# Altium PCB K10P100最小系统V1.0.PcbDoc (part 1 of 2)
Units mil, origin at the board's own origin, x right, y up, seen from the top; angles counter-clockwise.
Board outline 4763.81 x 2088.61 mil, 2 copper layers (Top Layer, Bottom Layer); 125 components, 121 nets, 468 pads, 200 vias.
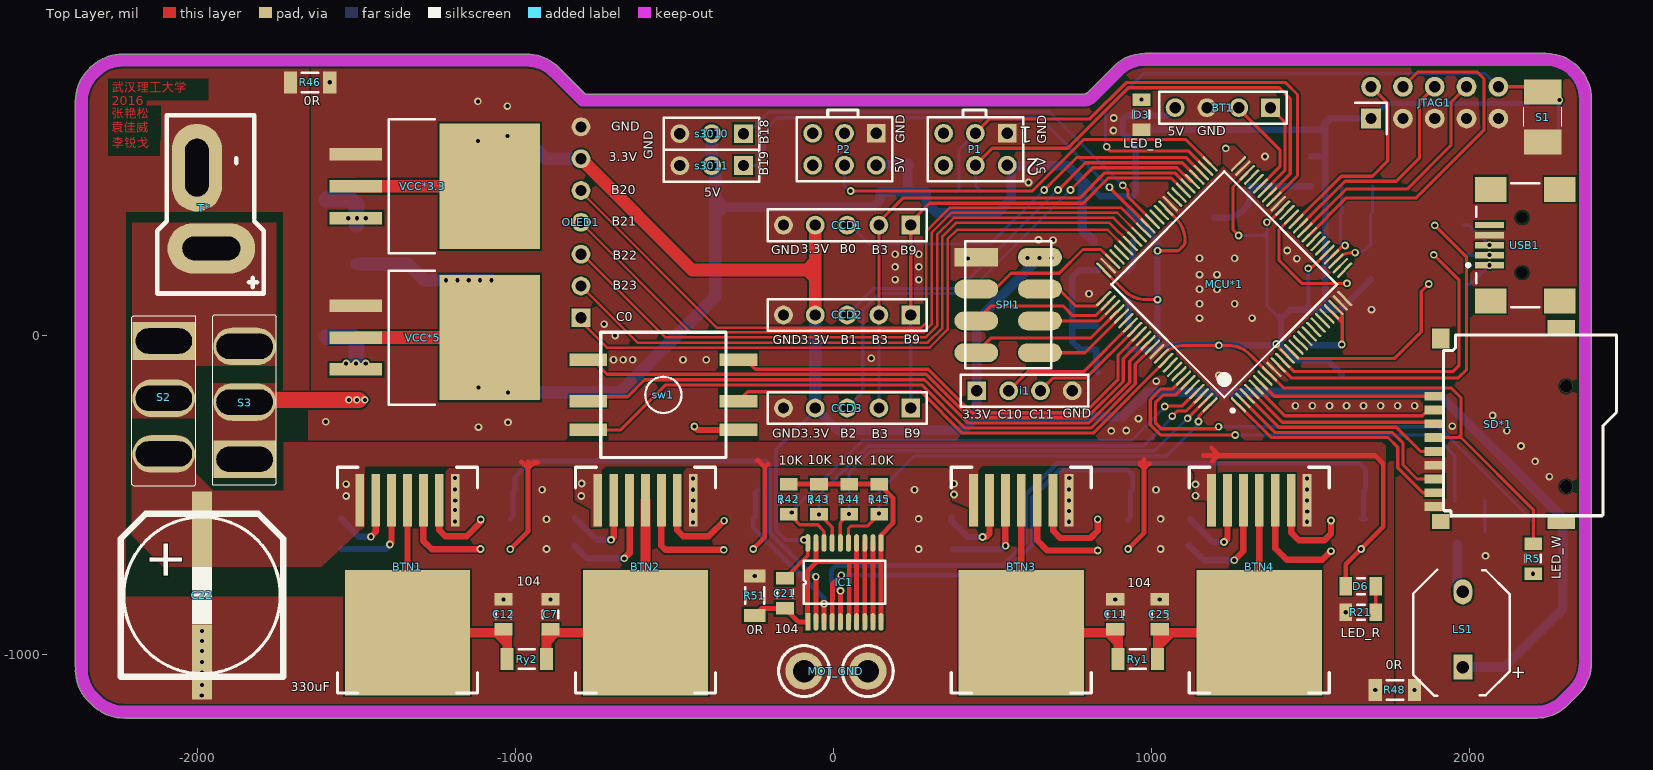
[diagram p0: Top Layer view]
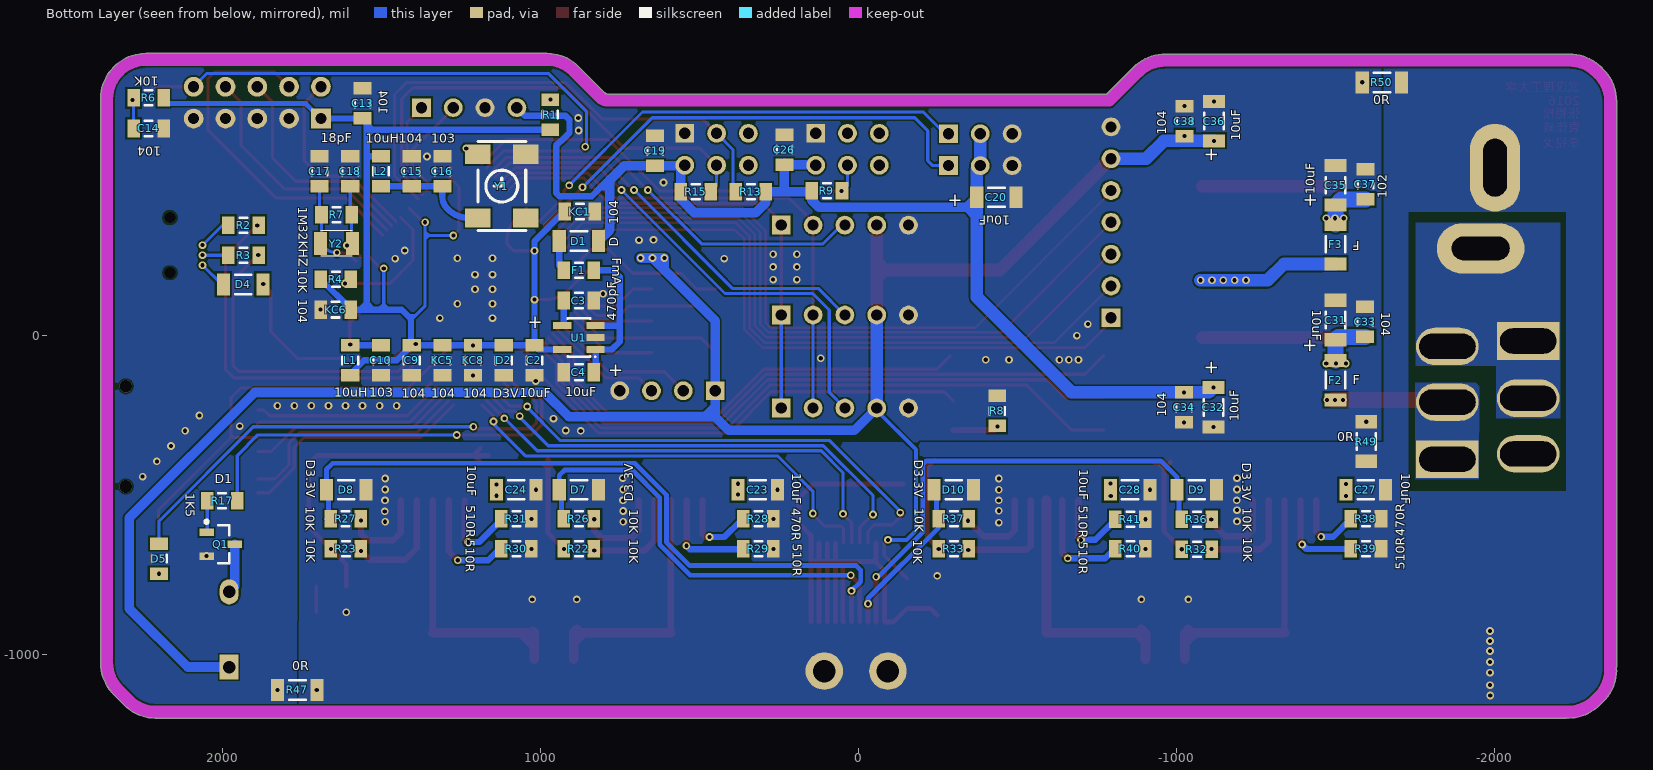
[diagram p1: Bottom Layer view, seen from below]

## Layer stack, top to bottom
Top Layer: signal copper 1.4
Dielectric: dielectric 12.6, FR-4, Dk 4.8
Bottom Layer: signal copper 1.4

## Board outline
-2381.9,-1050.2 ccw(c-2243.39,-1050.2) -2341.34,-1148.14 -2329.8,-1159.68 cw(c-2315.87,-1145.75) -2329.81,-1159.67 -2329.8,-1159.68 ccw(c-2230.51,-1060.39) -2230.51,-1200.8 ccw(c-2230.51,-1181.1) -2225.98,-1200.28 ccw(c-2221.46,-1181.1) -2221.46,-1200.8 2211.53,-1200.8 ccw(c2211.53,-1066.85) 2306.25,-1161.57 2340.78,-1127.04 ccw(c2241.49,-1027.76) 2381.9,-1027.76 ccw(c2362.2,-1027.76) 2380.8,-1021.26 ccw(c2362.2,-1014.76) 2381.9,-1014.76 2381.9,742.13 ccw(c2362.2,742.13) 2381.8,744.19 ccw(c2362.2,746.26) 2381.9,746.26 ccw(c2241.49,746.26) 2340.78,845.55 ccw(c2326.85,831.62) 2340.77,845.56 2340.78,845.55 2339.64,846.68 ccw(c2240.35,747.4) 2240.35,887.81 979.13,887.81 ccw(c979.13,747.4) 879.85,846.68 ccw(c893.78,832.75) 879.84,846.67 879.85,846.68 796.99,763.83 cw(c810.92,749.9) 797,763.84 796.99,763.83 ccw(c810.92,749.9) 796.97,763.8 ccw(c787.4,773.42) 796.99,763.83 796.97,763.8 cw(c787.4,773.42) 787.4,759.86 -779.24,759.86 -864.1,844.72 ccw(c-963.39,745.43) -963.39,885.84 -2234.45,885.84 ccw(c-2234.45,745.43) -2333.73,844.72 ccw(c-2319.8,830.79) -2333.74,844.71 -2333.73,844.72 -2340.78,837.67 cw(c-2326.85,823.74) -2340.77,837.68 -2340.78,837.67 ccw(c-2241.49,738.39) -2381.9,738.39 -2381.9,-1040.35 ccw(c-2362.2,-1040.35) -2381.28,-1045.28 ccw(c-2362.2,-1050.2)

## Design rules (kind name [scope] priority, off if disabled: settings)
Clearance Clearance_1 [All] p1: gap=6
Clearance [InNet('EGND')] p2: gap=15
PolygonConnect [All] p1: connectstyle=Direct reliefconductorwidth=10 reliefentries=4 polygonreliefangle="90 Angle" airgapwidth=10
RoutingVias [All] p1: holewidth=28 width=50 viastyle="Through Hole" minholewidth=28 minwidth=50 maxholewidth=28 maxwidth=50
SolderMaskExpansion [All] p1: expansion=4
Width [All] p1: maxlimit=50 minlimit=6 preferedwidth=20 minimp=50.000000 maximp=50.000000 favimp=50.000000
28 further rules are at their usual default settings.

## Classes and differential pairs
component class 电源: C31 C32 C33 C34 C35 C36 C37 C38 F2 F3 R46 R47 R48 R49 R50 S3 T* VCC*2 VCC*3.3 VCC*5
component class 电机驱动: BTN1 BTN2 BTN3 BTN4 C7 C11 C12 C22 C23 C24 C25 C27 C28 D6 D7 D8 D9 D10 IC5 MOT_GND R21 R22 R23 R26 R27 R28 R29 R30 R31 R32 R33 R36 R37 R38 R39 R40 R41 Ry1 Ry2 S2
component class 其他外设: BT1 C19 C20 C21 C26 CCD1 CCD2 CCD3 i1 IC1 LS1 OLED1 P1 P2 Q1 R8 R9 R13 R15 R17 R42 R43 R44 R45 R51 s3010 s3011 SD*1 SPI1 sw1 U3
component class K10P100最小系统V1.0: C2 C3 C4 C9 C10 C13 C14 C15 C16 C17 C18 D1 D2 D3 D4 D5 F1 JTAG1 KC1 KC5 KC6 KC8 L1 L2 MCU*1 R1 R2 R3 R4 R5 R6 R7 S1 U1 USB1 Y1 Y2

## Components (designator, comment, footprint, x,y, rotation, side; value= is the part's Value field where it differs from the comment)
BT1 "Header 4" HDR1X4 1374.02,717.52 r180 top
BTN1 "BTN7960" PG-TO263-7-1 -1338.58,-472.44 r180 top
BTN2 "BTN7960" PG-TO263-7-1 -590.55,-472.44 r180 top
BTN3 "BTN7960" PG-TO263-7-1 590.55,-472.44 r180 top
BTN4 "BTN7960" PG-TO263-7-1 1338.58,-472.44 r180 top
C2 "Cap Pol1" C2012 1018.7,-76.77 r270 bottom
C3 "470pF" C2012 878.94,111.22 r0 bottom
C4 "10UF" C2012 878.94,-114.17 r180 bottom
C7 "Cap" C2012 -888.78,-875 r90 top
C9 "100nF" C2012 1404.53,-76.77 r90 bottom
C10 "10nF" C2012 1500.98,-76.77 r90 bottom
C11 "Cap" C2012 885.83,-875 r90 top
C12 "Cap" C2012 -1036.42,-875 r90 top
C13 "100nF" C2012 1559.06,731.3 r90 bottom
C14 "100nF" C2012 2231.3,652.56 r0 bottom
C15 "10nF" C2012 1404.53,517.72 r270 bottom
C16 "100nF" C2012 1308.07,517.72 r270 bottom
C17 "18pF" C2012 1693.9,517.72 r270 bottom
C18 "18pF" C2012 1597.44,517.72 r270 bottom
C19 "100nF" C2012 639.76,581.69 r270 bottom
C20 "Cap Pol1" 1206(2) -433.07,436.02 r180 bottom
C21 "100nF" C2012 -152.56,-809.06 r270 top
C22 "Cap Pol1" SMD-EC-F12.5 -1984.25,-606.3 r270 top
C23 "Cap Pol1" 1206(2) 316.93,-483.27 r180 bottom
C24 "Cap Pol1" 1206(2) 1075.79,-483.27 r180 bottom
C25 "Cap" C2012 1025.59,-875 r270 top
C26 "100nF" C2012 233.27,585.63 r270 bottom
C27 "Cap Pol1" 1206(2) -1593.5,-483.27 r180 bottom
C28 "Cap Pol1" 1206(2) -853.35,-483.27 r180 bottom
C31 "Cap Pol1" 1206(2) -1499.02,50.2 r90 bottom
C32 "Cap Pol1" 1206(2) -1115.16,-224.41 r270 bottom
C33 "Cap" C2012 -1591.54,44.29 r270 bottom
C34 "Cap" C2012 -1022.64,-224.41 r90 bottom
C35 "Cap Pol1" 1206(2) -1499.02,473.43 r90 bottom
C36 "Cap Pol1" 1206(2) -1117.13,675.2 r90 bottom
C37 "Cap" C2012 -1592.52,476.38 r270 bottom
C38 "Cap" C2012 -1024.61,675.2 r270 bottom
CCD1 "CCD" HDR1X5 243.11,348.43 r180 top
CCD2 "CCD" HDR1X5 243.11,65.94 r180 top
CCD3 "CCD" HDR1X5 243.11,-226.38 r180 top
D1 "Diode" 1206(2) 878.94,298.23 r0 bottom
D2 "1N4729A" C2012 1115.16,-76.77 r90 bottom
D3 "POWER" C2012 968.5,695.87 r270 top
D4 "Diode" 1206(2) 1934.06,162.4 r180 bottom
D5 "POWER" C2012 2198.82,-699.8 r90 bottom
D6 "LED" C2012 1657.48,-786.42 r0 top
D7 "1SS355" 1206(2) 878.94,-483.27 r0 bottom
D8 "1SS355" 1206(2) 1610.24,-483.27 r0 bottom
D9 "1SS355" 1206(2) -1062.99,-483.27 r0 bottom
D10 "1SS355" 1206(2) -299.21,-483.27 r0 bottom
F1 "300mA" R2012 878.94,206.69 r0 bottom
F2 "1.5A" 1206(2) -1499.02,-138.78 r90 bottom
F3 "500mA" 1206(2) -1499.02,288.39 r90 bottom
i1 "Header 4" HDR1X4 450.79,-172.24 r0 top
IC1 "74LVC245" "TSSOP20 74lvc245" 34.45,-773.62 r90 top
JTAG1 "Header 5X2" IDC5X2 1889.76,733.27 r0 top
KC1 "100nF" C2012 875.98,390.75 r0 bottom
KC5 "100nF" C2012 1308.07,-76.77 r90 bottom
KC6 "100nF" C2012 1643.7,82.68 r180 bottom
KC8 "100nF" C2012 1211.61,-76.77 r90 bottom
L1 "Inductor" C2012 1597.44,-76.77 r90 bottom
L2 "Inductor" C2012 1500.98,517.72 r270 bottom
LS1 "Buzzer" ABSM-1574 1968.5,-1154.53 r90 top
MCU*1 "k60P100" LQFP100 1228.35,162.4 r135 top
MOT_GND "Motor" KF301-2P 7.87,-1053.15 r180 top
OLED1 "Header 7" HDR1X7 -793.31,57.09 r90 top
P1 "Header 3X2" HDR2X3 546.26,636.81 r180 top
P2 "Header 3X2" HDR2X3 134.84,636.81 r180 top
Q1 "QNPN" SOT95P240-3N 2004.92,-654.53 r180 bottom
R1 "1K" R2012 968.5,695.87 r270 bottom
R2 "33R" R2012 1933.07,348.43 r180 bottom
R3 "33R" R2012 1933.07,253.94 r180 bottom
R4 "10K" R2012 1642.72,178.15 r180 bottom
R5 "1K" R2012 2198.82,-699.8 r90 top
R6 "10K" R2012 2231.3,748.03 r180 bottom
R7 "1M" R2012 1640.75,380.91 r180 bottom
R8 "0R" R2012 -435.04,-235.24 r270 bottom
R9 "Res2" R2012 99.41,456.69 r0 bottom
R13 "Res2" R2012 338.58,453.74 r180 bottom
R15 "Res2" R2012 511.81,453.74 r180 bottom
R17 "Res2" R2012 2000,-517.72 r180 bottom
R21 "Res2" R2012 1657.48,-868.11 r0 top
R22 "Res2" R2012 878.94,-669.29 r0 bottom
R23 "Res2" R2012 1611.22,-669.29 r180 bottom
R26 "Res2" R2012 878.94,-574.8 r180 bottom
R27 "Res2" R2012 1612.2,-574.8 r0 bottom
R28 "Res2" R2012 314.96,-574.8 r0 bottom
R29 "Res2" R2012 314.96,-669.29 r0 bottom
R30 "Res2" R2012 1075.79,-669.29 r0 bottom
R31 "Res2" R2012 1075.79,-574.8 r0 bottom
R32 "Res2" R2012 -1062.99,-670.28 r0 bottom
R33 "Res2" R2012 -299.21,-669.29 r180 bottom
R36 "Res2" R2012 -1062.99,-575.79 r180 bottom
R37 "Res2" R2012 -299.21,-574.8 r0 bottom
R38 "Res2" R2012 -1594.49,-574.8 r0 bottom
R39 "Res2" R2012 -1594.49,-669.29 r0 bottom
R40 "Res2" R2012 -854.33,-669.29 r0 bottom
R41 "Res2" R2012 -854.33,-575.79 r0 bottom
R42 "Res2" R2012 -139.76,-512.8 r90 top
R43 "Res2" R2012 -45.28,-512.8 r90 top
R44 "Res2" R2012 49.21,-512.8 r90 top
R45 "Res2" R2012 143.7,-512.8 r90 top
R46 "Res2" 1206(2) -1644.68,797.24 r180 top
R47 "Res2" 1206(2) 1763.78,-1112.2 r180 bottom
R48 "Res2" 1206(2) 1764.76,-1112.2 r180 top
R49 "Res2" 1206(2) -1595.47,-331.69 r270 bottom
R50 "Res2" 1206(2) -1644.68,797.24 r180 bottom
R51 "Res2" 1206(2) -247.05,-815.94 r270 top
Ry1 "" 1206(2) 956.69,-1015.75 r0 top
Ry2 "" 1206(2) -963.58,-1015.75 r0 top
S1 "SW-PB" "sw 3*4 *2" 2289.37,609.25 r90 top
S2 "SW-SPST" SW-125V6A(-) -2104.33,-15.75 r270 top
S3 "SW-SPST" SW-125V6A(-) -1850.39,-387.8 r90 top
s3010 "Header 3" HDR1X3 -282.48,635.83 r180 top
s3011 "Header 3" HDR1X3 -282.48,535.43 r180 top
SD*1 "TF_card" SD_card 2233.27,-353.35 r180 top
SPI1 "Header 4X2A" "SMT head4*1" 554.13,92.52 r0 top
sw1 "SW-5" SW-5 -534.45,-185.04 r0 top
T* "T头" T插 -1971.46,478.35 r270 top
U1 "MIC5219" SOT-23-5 878.94,-4.92 r90 bottom
USB1 "USB-MINI-B" USB-MINI-B 2371.06,285.43 r0 top
VCC*3.3 "LM1086" "DPAK LM2940" -1252.95,470.47 r0 top
VCC*5 "LM1084" "DPAK LM2940" -1252.95,-4.92 r0 top
Y1 "50MHZ" 贴片有源晶体 1046.26,371.06 r90 bottom
Y2 "32.768K" CT3215 1690.94,290.35 r180 bottom

## Footprints (in the part's own frame and the unit in brackets; to place one, negate y for a bottom-side part, rotate by r counter-clockwise, add the part's x,y. Pads: shape width x height; smd on the part's side, far side on the other; paste and mask are expansions set on the pad)
1206(2) [mm]
  rect 1.05x1.75 smd: 1(-1.575,0) 2(1.575,0)
  silkscreen extent -0.65,-0.77 0.65,0.77, body extent -1.6,-0.8 1.6,0.8, height 1.6
ABSM-1574 [mm] "Magnetic Transducer Buzzer"
  rect 2x1.5 hole 1: 1A(2.9,-0.25)
  oval 2x1.5 hole 1: 2A(8.9,-0.25)
  silkscreen extent 0.6,-4 10.68,3.72
C2012 [mm] "Chip Capacitor, 2-Leads, Body 2.0x1.2mm, IPC Low Density"
  rect 1x1.45 smd: 1(-1.2,0) 2(1.2,0)
  silkscreen extent -0.3,-0.63 0.3,0.63, body extent -0.98,-0.6 1.02,0.6, height 0.5
CT3215 [mm]
  rect 1.05x1.85 smd: 1(0,0) 2(2.54,0)
  silkscreen extent 0,-1.02 2.54,1.02
"DPAK LM2940" [mm] "D2-PAK, 4-Pads, Body 7.93x8.69mm (max), IPC Medium Density"
  rect 4.2x1 smd: 1(-6.3,2.54) 2(-6.3,0) 3(-6.3,-2.54)
  rect 8x10 smd: 4(4.4,0)
  silkscreen extent -3.65,-5.35 0,5.35, body extent -3.65,-5.33 6,5.33, height 4.83
HDR1X3 [mm] "Connector; Header; 3 Position"
  rect 1.5x1.5 hole 0.9: 1(0,0)
  round 1.5 hole 0.9: 2(2.54,0) 3(5.08,0)
  silkscreen extent -1.27,-1.27 6.35,1.27, body extent -1.27,-1.27 6.35,1.27, height 7.58
HDR1X4 [mm] "Connector; Header; 4 Position"
  rect 1.5x1.5 hole 0.9: 1(0,0)
  round 1.5 hole 0.9: 2(2.54,0) 3(5.08,0) 4(7.62,0)
  silkscreen extent -1.27,-1.27 8.89,1.27, body extent -1.27,-1.27 8.89,1.27, height 7.58
HDR1X5 [mm] "Connector; Header; 5 Position"
  rect 1.5x1.5 hole 0.9: 1(0,0)
  round 1.5 hole 0.9: 2(2.54,0) 3(5.08,0) 4(7.62,0) 5(10.16,0)
  silkscreen extent -1.27,-1.27 11.43,1.27
HDR1X7 [mm] "Connector; Header; 7 Position"
  rect 1.5x1.5 hole 0.9: 1(0,0)
  round 1.5 hole 0.9: 2(2.54,0) 3(5.08,0) 4(7.62,0) 5(10.16,0) 6(12.7,0) 7(15.24,0)
HDR2X3 [mm] "Connector; Header; 3x2 Position"
  rect 1.5x1.5 hole 0.9: 1(0,0)
  round 1.5 hole 0.9: 2(0,2.54) 3(2.54,0) 4(2.54,2.54) 5(5.08,0) 6(5.08,2.54)
  silkscreen extent -1.27,-1.27 6.35,3.81, body extent -1.27,-1.27 6.35,3.81, height 7.58
IDC5X2 [mil]
  rect 62x62 hole 35: 1(-200,-50)
  round 62 hole 35: 2(-200,50) 3(-100,-50) 4(-100,50) 5(0,-50) 6(0,50) 7(100,-50) 8(100,50) 9(200,-50) 10(200,50)
  silkscreen extent -250,-100 -150,0
KF301-2P [mm]
  round 3 hole 1.8: 1(-2.54,0) 2(2.54,0)
  silkscreen extent -4.57,-2.03 4.57,2.03
LQFP100 [mm] "SQFP, 100-Leads, Body 14.00x14.00mm, Pitch 0.50mm, IPC Medium Density"
  oval 1.65x0.2 smd: 1(-7.6,6) 2(-7.6,5.5) 3(-7.6,5) 4(-7.6,4.5) 5(-7.6,4) 6(-7.6,3.5) 7(-7.6,3) 8(-7.6,2.5) 9(-7.6,2) 10(-7.6,1.5) 11(-7.6,1) 12(-7.6,0.5) 13(-7.6,0) 14(-7.6,-0.5) 15(-7.6,-1) 16(-7.6,-1.5) 17(-7.6,-2) 18(-7.6,-2.5) 19(-7.6,-3) 20(-7.6,-3.5) 21(-7.6,-4) 22(-7.6,-4.5) 23(-7.6,-5) 24(-7.6,-5.5) 25(-7.6,-6) 51(7.6,-6) 52(7.6,-5.5) 53(7.6,-5) 54(7.6,-4.5) 55(7.6,-4) 56(7.6,-3.5) 57(7.6,-3) 58(7.6,-2.5) 59(7.6,-2) 60(7.6,-1.5) 61(7.6,-1) 62(7.6,-0.5) 63(7.6,0) 64(7.6,0.5) 65(7.6,1) 66(7.6,1.5) 67(7.6,2) 68(7.6,2.5) 69(7.6,3) 70(7.6,3.5) 71(7.6,4) 72(7.6,4.5) 73(7.6,5) 74(7.6,5.5) 75(7.6,6)
  oval 0.2x1.65 smd: 26(-6,-7.6) 27(-5.5,-7.6) 28(-5,-7.6) 29(-4.5,-7.6) 30(-4,-7.6) 31(-3.5,-7.6) 32(-3,-7.6) 33(-2.5,-7.6) 34(-2,-7.6) 35(-1.5,-7.6) 36(-1,-7.6) 37(-0.5,-7.6) 38(0,-7.6) 39(0.5,-7.6) 40(1,-7.6) 41(1.5,-7.6) 42(2,-7.6) 43(2.5,-7.6) 44(3,-7.6) 45(3.5,-7.6) 46(4,-7.6) 47(4.5,-7.6) 48(5,-7.6) 49(5.5,-7.6) 50(6,-7.6) 76(6,7.6) 77(5.5,7.6) 78(5,7.6) 79(4.5,7.6) 80(4,7.6) 81(3.5,7.6) 82(3,7.6) 83(2.5,7.6) 84(2,7.6) 85(1.5,7.6) 86(1,7.6) 87(0.5,7.6) 88(0,7.6) 89(-0.5,7.6) 90(-1,7.6) 91(-1.5,7.6) 92(-2,7.6) 93(-2.5,7.6) 94(-3,7.6) 95(-3.5,7.6) 96(-4,7.6) 97(-4.5,7.6) 98(-5,7.6) 99(-5.5,7.6) 100(-6,7.6)
  silkscreen extent -7.72,-6.38 6.38,6.77, body extent -7,-7 7,7, height 1.7
PG-TO263-7-1 [mm]
  rect 0.7x4.2 smd: 1(-3.81,1.123) 2(-2.54,1.123) 3(-1.27,1.123) 4(0,1.123) 5(1.27,1.123) 6(2.54,1.123) 7(3.81,1.123)
  rect 10x10 smd: 8(0,11.684)
  silkscreen extent -5.59,-1.52 5.59,16.51
R2012 [mm] "Chip Resistor, 2-Leads, Body 2.0x1.2mm, IPC Low Density"
  rect 1x1.4 smd: 1(-1.2,0) 2(1.2,0)
  silkscreen extent -0.3,-0.6 0.3,0.6, body extent -0.98,-0.6 1.02,0.6, height 0.5
SD_card [mm]
  rect 1.6x0.7 smd: 1(8.732,-4.16) 2(8.732,-3.06) 3(8.732,-1.96) 4(8.732,-0.86) 5(8.732,0.24) 6(8.732,1.34) 7(8.732,2.44) 8(8.732,3.54) 9(8.732,4.64)
  rect 1.4x1.2 smd: 10(8.232,5.84)
  rect 2.2x1.2 smd: 11(-1.368,5.84) 12(-1.368,-9.66)
  rect 1.4x1.6 smd: 13(8.232,-8.76)
  silkscreen extent -5.79,-9.04 8.03,5.43
SMD-EC-F12.5 [mm]
  rect 6x1.6 smd: 1(0,0) 2(10.625,0)
  silkscreen extent -1.2,-6.5 11.8,6.49
"SMT head4*1" [mil]
  rect 137.8x59.06 smd: 1(-105,155)
  oval 137.8x59.06 smd: 2(-105,55) 3(-105,-45) 4(-105,-145) 5(95,155) 6(95,55) 7(95,-45) 8(95,-145)
  silkscreen extent -140,-194 130,206
SOT95P240-3N [mm] "SOT23, 3-Leads, Body 2.9x1.3mm, Pitch 0.95mm, Lead Span 2.4mm, IPC Medium Density"
  rect 1.15x0.6 smd: 1(-1.125,0.95) 2(-1.125,-0.95) 3(1.125,0)
  silkscreen extent -1.25,-1.5 0.7,1.92, body extent -0.7,-1.5 0.7,1.5, height 1.14
SOT-23-5 [mm] "SOT-23/SC-74A; 5 Leads; Body 3.1 x 3 mm, inc. leads (LxW max)"
  rect 0.55x1.45 smd: 1(-0.95,-1.329) 2(0,-1.329) 3(0.95,-1.329) 4(0.95,1.329) 5(-0.95,1.329)
  silkscreen extent -1.57,-1.35 1.55,0.9
"sw 3*4 *2" [mm]
  rect 2x3 smd: 1(0,1.524) 2(4,1.524)
  silkscreen extent 1.27,0 2.79,3.05
SW-5 [mm]
  rect 3x1 smd: 1(-6,2.8) 2(-6,-0.5) 3(-6,-2.8) 4(6,-2.8) 5(6,-0.5) 6(6,2.8)
  silkscreen extent -5,-5 5,5
SW-125V6A(-) [mm]
  rect 3x5 hole 2 slot 4.5 at 90 deg: 0(0,0)
  oval 3x5 hole 2 slot 4.5 at 90 deg: 1(4.572,0) 2(9.017,0)
  silkscreen extent -2.03,-2.54 11.56,2.54
"TSSOP20 74lvc245" [mm]
  rect 1.4x0.4 smd: 1(-3.175,2.921)
  oval 1.4x0.4 smd: 2(-3.175,2.271) 3(-3.175,1.621) 4(-3.175,0.971) 5(-3.175,0.321) 6(-3.175,-0.329) 7(-3.175,-0.979) 8(-3.175,-1.629) 9(-3.175,-2.279) 10(-3.175,-2.929) 11(3.125,-2.929) 12(3.125,-2.279) 13(3.125,-1.629) 14(3.125,-0.979) 15(3.125,-0.329) 16(3.125,0.321) 17(3.125,0.971) 18(3.125,1.621) 19(3.125,2.271) 20(3.125,2.921)
  silkscreen extent -1.74,-3.25 1.69,3.25
T插 [mm]
  oval 4x7 hole 1.9 slot 4.6 at 90 deg: 1(5.161,0.416)
  oval 7x4 hole 1.9 slot 4.6 at 0 deg: 2(-1.283,-0.727)
  silkscreen extent -5.46,-3.9 8.75,4.61
USB-MINI-B [mm] "Connector; USB2.0, Type A, SM; 5 Position; Right Angle"
  rect 2.3x0.5 smd: 1(-7.85,-1.6) 2(-7.85,-0.8) 3(-7.85,0) 4(-7.85,0.8) 5(-7.85,1.6)
  rect 2.5x2 smd: 6(-7.75,4.45) 7(-2.25,4.45) 8(-7.75,-4.45) 9(-2.25,-4.45)
  round 0.6 hole 0.9 unplated: MH1(-5.25,2.2) MH2(-5.25,-2.2)
  silkscreen extent -9.67,-4.95 -3.9,4.95, body extent -8.55,-5.35 0.65,5.35, height 3.95
贴片有源晶体 [mil]
  rect 60x80 smd: 1(0,0) 2(200,0) 3(200,150) 4(0,150)
  silkscreen extent -40,0 240,150, body extent -38,-23 238,173, height 74

## Part data
BT1 i1: "Header, 4-Pin"
C2 C20 C22 C23 C24 C27 C28 C31 C32 C35 C36: "Polarized Capacitor (Radial)"
C3 C17 C18: library part 陶瓷电容, "CAP"
C4 C9 C10 C13 C14 C15 C16 C19 C21 C26 KC1 KC5 KC6 KC8: library part Cap, "Capacitor"
C7 C11 C12 C25: "Capacitor"
C33 C34 C37 C38: "贴片电容"
CCD1 CCD2 CCD3: library part "Header 5", "Header, 5-Pin"
D1 D4: "Default Diode"
D2 D7 D8 D9 D10: library part "Diode 1N4148", "High Conductance Fast Diode"
D3 D5: library part LED, "Typical INFRARED GaAs LED"
D6: "Typical INFRARED GaAs LED"
F1 F2 F3: library part "Fuse 1", "Fuse"
JTAG1: "Header, 5-Pin, Dual row"
LS1: "Magnetic Transducer Buzzer"
MOT_GND: "Motor, General Kind"
OLED1: "Header, 7-Pin"
P1 P2: "Header, 3-Pin, Dual row"
Q1: "NPN Bipolar Transistor"
R1 R4 R5 R8: library part Res, "Resistor of led"
R2 R3: library part Res, "贴片电阻"
R6 R7 Ry1 Ry2: library part Res, "Resistor"
R9 R13 R15 R17 R21 R22 R23 R26 R27 R28 R29 R30 R31 R32 R33 R36 R37 R38 R39 R40 R41 R42 R43 R44 R45 R46 R47 R48 R49 R50 R51: "Resistor"
S1: "Switch"
S2 S3: "Single-Pole, Single-Throw Switch"
s3010 s3011: "Header, 3-Pin"
SPI1: "Header, 4-Pin, Dual row"
T*: library part Tͷ
U1: "LDO"
USB1: "USB 2.0, Right Angle, SMT, A Type, Receptacle, 5 Position, Black"
VCC*5: library part LM1086
Y1: library part XTAL1
Y2: library part XTAL, "Crystal Oscillator"

## Via types
v1: diameter 24, hole 13, Top Layer to Bottom Layer, 198 vias
v2: diameter 39.37, hole 39.37, Top Layer to Bottom Layer, 2 vias

## Nets (pads, with @x,y where several pads share a name; then routed paths per layer and width w, separated by ;. In a path a pad name is that pad's centre, name@x,y a point inside that pad or via, vN(x,y) a via of type N, cw(c..) or ccw(c..) an arc to the next point about the centre after c; other vN are vias at no path point)
3.3V: C21.1 C36.1 C38.2 CCD1.4 CCD2.4 CCD3.4 i1.1 IC1.20 LS1.1A OLED1.6 SPI1.5 VCC*3.3.2 VCC*3.3.4 | length 6972.1
  Top Layer w12: C21.1@-152.56,-761.81 -80.55,-689.8 IC1.20@-80.55,-650.59
  Top Layer w40: VCC*3.3.2@-1500.98,470.47 VCC*3.3.4@-1079.72,470.47 ; OLED1.6@-793.31,557.09 -443.9,207.68 -82.68,207.68 ; CCD2.4@-56.89,65.94 -56.89,181.89 ; CCD1.4@-56.89,348.43 -56.89,233.46 ; -82.68,207.68 -56.89,233.46 ; -82.68,207.68 -56.89,181.89 ; -56.89,181.89 -56.89,233.46
  Bottom Layer w12: v1(-92.52,-640.75) -150.59,-640.75 -180.12,-611.22 -180.12,-357.28 -56.89,-234.06 CCD3.4@-56.89,-226.38
  Bottom Layer w30: CCD3.4@-56.89,-226.38 12.99,-296.26 408.46,-296.26 450.79,-253.94 ; v1(685.04,245.08) v1(647.64,245.08) ; LS1.1A@1978.35,-1040.35 2108.44,-1040.35 2292.32,-856.47 2292.32,-571.85 1897.64,-177.17 987.2,-177.17 910.43,-253.94 482.28,-253.94 ; 450.79,-253.94 450.79,-222.44 ; 450.79,-253.94 482.28,-253.94 ; 450.79,-222.44 482.28,-253.94 ; 450.79,-222.44 i1.1@450.79,-172.24 450.79,48.23 610.24,207.68 ; 610.24,207.68 v1(610.24,245.08) v1(647.64,245.08) ; 610.24,207.68 v1(647.64,245.08)
  Bottom Layer w40: v1(-1117.13,613.19) -959.65,613.19 -903.54,557.09 OLED1.6@-793.31,557.09 ; v1(-1024.61,627.95) C38.2@-1009.84,613.19 ; CCD3.4@-56.89,-226.38 CCD2.4@-56.89,65.94
5V: BT1.4 C19.2 C20.1 C26.2 C32.1 C34.2 D1.1 F3.1 P1.2 P2.2 R9.2 R13.2 R15.1 s3010.2 s3011.2 VCC*5.2 VCC*5.4 | length 4749.9
  Top Layer w40: VCC*5.2@-1500.98,-4.92 VCC*5.4@-1079.72,-4.92
  Bottom Layer w20: 781.5,490.16 788.39,490.16 811.02,467.52 ; 785.43,467.52 811.02,467.52 ; BT1.4@1074.02,717.52 1048.43,691.93 921.26,691.93 908.46,679.13 908.46,638.79 934.32,612.94 936.28,612.94 950.79,598.43 950.79,449.8 940.5,439.52 839.02,439.52 811.02,467.52
  Bottom Layer w30: -371.06,374.34 -340.22,405.18 ; C20.1@-368.11,433.07 -340.22,405.18 ; P2.2@134.84,536.81 136.42,538.39 C26.2@233.27,538.39 233.27,455.71 235.24,453.74 ; P1.2@546.26,536.81 P1.2@548.62,534.45 ; D1.1@816.93,298.23 781.5,333.66 781.5,490.16 737.2,534.45 C19.2@639.76,534.45 P1.2@548.62,534.45 ; -340.22,405.18 125.65,405.18 146.65,426.18 146.65,453.74 235.24,453.74 ; 235.24,453.74 R13.2@291.34,453.74 291.34,419.29 323.82,386.81 515.75,386.81 559.06,430.12 R15.1@559.06,453.74 559.06,524.02 P1.2@548.62,534.45
  Bottom Layer w40: F3.1@-1499.02,226.38 -1336.61,226.38 -1285.43,175.2 v1(-1217.52,175.2) v1(-1181.84,175.2) v1(-1146.16,175.2) v1(-1110.48,175.2) v1(-1074.8,175.2) ; v1(-1115.16,-162.4) -1100.39,-177.17 v1(-1022.64,-177.17) -670.28,-177.17 -371.06,122.05 -371.06,374.34 C20.1@-371.06,436.02 -371.06,524.02 s3011.2@-382.48,535.43 s3010.2@-382.48,635.83 ; C26.2@231.69,536.81 C26.2@233.27,538.39
"BT RXD": BT1.1 MCU*1.44 | length 304.5
  Top Layer w10: MCU*1.44@1356.41,457.49 1419.29,520.38 1419.29,671.26 BT1.1@1373.52,717.03
"BT TXD": BT1.2 MCU*1.45 | length 323.9
  Top Layer w10: BT1.2@1272.34,715.85 1403.29,584.9 1403.29,532.22 MCU*1.45@1342.49,471.41
"CCD1 AD": CCD1.3 MCU*1.53 | length 1273.2
  Top Layer w10: v1(662.4,458.66) 764.17,560.43 1108.71,560.43 MCU*1.53@1155.97,513.17
  Bottom Layer w10: CCD1.3@43.11,358.27 112.01,289.37 493.11,289.37 v1(662.4,458.66)
"CCD2 AD": CCD2.3 MCU*1.54 | length 1321.4
  Top Layer w10: v1(705.71,458.66) 703.74,456.69 704.72,456.69 792.46,544.43 1096.87,544.43 MCU*1.54@1142.05,499.25
  Bottom Layer w10: CCD2.3@43.11,65.94 126.77,149.61 396.65,149.61 v1(705.71,458.66)
"CCD3 AD": CCD3.3 MCU*1.55 | length 1567
  Top Layer w10: v1(745.08,458.66) 814.84,528.43 1079.82,528.43 1122.92,485.33 MCU*1.55@1128.13,485.33
  Bottom Layer w10: CCD3.3@43.11,-226.38 92.52,-176.97 92.52,81.69 144.43,133.61 420.02,133.61 v1(745.08,458.66)
"CCD CLK": CCD1.2 CCD2.2 CCD3.2 MCU*1.56 | length 1636.6
  Top Layer w10: CCD2.2@143.11,65.94 143.11,358.27 218.16,433.32 773.87,433.32 852.98,512.43 1073.19,512.43 MCU*1.56@1114.21,471.41
  Bottom Layer w10: CCD3.2@143.11,-226.38 CCD2.2@143.11,65.94
"CCD SI": CCD1.1 CCD2.1 CCD3.1 MCU*1.57 | length 1515.2
  Top Layer w10: CCD2.1@243.11,65.94 243.11,358.27 302.16,417.32 784.82,417.32 863.93,496.43 1061.36,496.43 MCU*1.57@1100.29,457.49
  Bottom Layer w10: CCD3.1@243.11,-226.38 CCD2.1@243.11,65.94
CE: MCU*1.73 SPI1.2 | length 495.1
  Top Layer w10: SPI1.2@449.13,147.52 508.74,147.52 558.07,196.85 709.65,196.85 784.45,271.65 840.71,271.65 MCU*1.73@877.58,234.78
EGND: BTN1.1 BTN2.1 BTN3.1 BTN4.1 C7.2 C11.2 C12.2 C22.2 C23.2 C24.2 C25.1 C27.2 C28.2 D7.1 D8.1 D9.1 D10.1 MOT_GND.1 MOT_GND.2 R21.1 R28.1 R29.1 R30.1 R31.1 R38.1 R39.1 R40.1 R41.1 R46.2 R47.2 R48.2 R49.2 R50.2 R51.1 T*.2
  other v1: -1985.24,-1129.92 1702.76,-1112.2 -1984.25,-1097.44 -1984.25,-1058.07 -1984.25,-1024.61 -1984.25,-990.16 -1984.25,-958.66 -1984.25,-927.17 1610.24,-868.11 -1036.42,-827.76 -888.78,-827.76 885.83,-827.76 1025.59,-827.76 -247.05,-753.94 -901.57,-669.29 267.72,-669.29 1028.54,-669.29 -440.94,-586.61 740.16,-583.66 1488.19,-583.66 -1188.98,-582.68 -901.57,-575.79 267.72,-574.8 1028.54,-574.8 1489.17,-551.18 740.16,-550.2 -440.94,-549.21 -1188.98,-547.24 -1188.58,-516.65 -440.55,-516.65 740.55,-516.65 1488.58,-516.65 -915.35,-483.27 -440.94,-483.27 254.92,-483.27 1013.78,-483.27 -1188.98,-482.28 740.16,-482.28 1488.19,-482.28 -440.94,-447.83 1488.19,-447.83 -1188.98,-446.85 741.14,-446.85
GND: BT1.3 C2.2 C3.1 C4.1 C9.1 C10.1 C13.2 C14.1 C15.1 C16.1 C17.1 C18.1 C19.1 C20.2 C26.1 C31.2 C32.2 C33.1 C34.1 C35.2 C36.2 C37.1 C38.1 CCD1.5 CCD2.5 CCD3.5 D2.1 D3.2 i1.4 JTAG1.3 JTAG1.5 JTAG1.7 JTAG1.9 KC1.1 KC5.1 KC6.1 KC8.1 MCU*1.9 MCU*1.24 MCU*1.25 MCU*1.41 MCU*1.49 MCU*1.60 MCU*1.74 MCU*1.88 OLED1.7 P1.1 P2.1 Q1.2 R8.1 R46.1 R47.1 R48.1 R49.1 R50.1 S1.1 s3010.3 s3011.3 SD*1.6 SD*1.9 SPI1.1 U1.2 USB1.4 VCC*3.3.1 VCC*5.1 Y1.2
  other v1: 1826.77,-1112.2 2049.21,-690.94 2250,-441.93 2205.46,-393.95 2160.93,-345.96 873.03,-298.23 2116.39,-297.98 920.28,-297.24 -1115.16,-286.42 1944.88,-283.46 -1022.64,-271.65 -1595.47,-269.68 958.66,-259.84 2071.85,-250 1451.77,-219.49 1505.34,-219.49 1558.91,-219.49 1612.49,-219.49 1666.06,-219.49 1719.63,-219.49 1773.2,-219.49 1826.77,-219.49 1014.76,-141.73 1211.61,-124.02 -690.94,-74.8 -660.93,-74.8 -630.91,-74.8 -472.44,-74.8 -399.61,-74.8 119.09,-69.88 -686.02,0.98 -720.47,37.4 1150.59,56.1 1315.94,56.1 1690.94,82.68 1150.59,101.38 1260.83,101.38 803.15,132.87 1150.59,146.65 1205.71,146.65 193.9,177.17 268.7,177.17 1150.59,192.91 1205.71,192.91 193.9,217.03 268.7,217.03 422.24,243.11 1456.69,243.11 1150.59,244.09 1260.83,244.09 193.9,256.89 268.7,256.89 1426.18,268.7 689.96,301.18 644.68,302.17 613.19,482.28 1356.3,563.98 879.92,645.67 880.91,685.04 -1024.61,722.44 -1117.13,737.2 -1582.68,797.24
GND1: C21.2 IC1.1 IC1.6 IC1.7 IC1.8 IC1.9 IC1.10 IC1.11 IC1.12 IC1.13 IC1.14 IC1.19 R42.2 R43.2 R44.2 R45.2 R51.2 | length 2340.7
  Top Layer w15: R51.2@-247.05,-877.95 -225.39,-856.3 C21.2@-152.56,-856.3 -110.24,-898.62 IC1.1@-80.55,-898.62 -81.6,-897.57 -81.6,-739.08 -54.96,-712.44 IC1.19@-54.96,-650.59 ; R42.2@-139.76,-465.55 R43.2@-45.28,-465.55 R44.2@49.21,-465.55 R45.2@143.7,-465.55 187.01,-508.86 187.01,-588.58 149.76,-625.83 IC1.11@149.76,-650.59 149.76,-706.69 ; -51.18,-708.66 50.11,-708.66 ; IC1.6@47.4,-898.62 50.11,-895.92 50.11,-708.66 ; IC1.7@72.99,-898.62 72.99,-708.66 ; IC1.14@72.99,-650.59 72.99,-708.66 ; IC1.8@98.58,-898.62 98.58,-708.66 ; IC1.13@98.58,-650.59 98.58,-708.66 ; IC1.9@124.17,-898.62 124.17,-708.66 ; IC1.12@124.17,-650.59 124.17,-708.66 ; 148.78,-727.36 149.76,-728.35 ; IC1.10@149.76,-898.62 149.76,-728.35 ; 50.11,-708.66 72.99,-708.66 ; 72.99,-708.66 98.58,-708.66 ; 98.58,-708.66 124.17,-708.66 ; 124.17,-708.66 147.8,-708.66 149.76,-706.69 ; 149.76,-728.35 149.76,-706.69
IRQ: MCU*1.80 SPI1.8 | length 303.8
  Top Layer w10: SPI1.8@649.13,-52.48 790.75,-52.48 MCU*1.80@905.42,62.18
K3.3V: C2.1 C9.2 C13.1 D2.2 JTAG1.1 KC1.2 KC5.2 KC6.2 KC8.2 L1.1 L2.1 MCU*1.8 MCU*1.12 MCU*1.30 MCU*1.40 MCU*1.48 MCU*1.61 MCU*1.75 MCU*1.89 R1.2 R4.1 R5.2 R6.2 SD*1.4 U1.5 | length 6768.5
  Top Layer w10: MCU*1.75@849.74,206.94 913.22,143.46 ccw(c983.93,214.17) 983.93,114.17 v1(1018.7,114.17) ; v1(1018.7,267.72) 1080.47,267.72 ccw(c1080.47,277.8) 1087.6,270.67 1098.36,281.43 ccw(c1081.55,298.23) 1105.31,298.23 1105.32,299.69 ccw(c1005.32,299.69) 1076.03,370.4 MCU*1.61@1044.61,401.82 ; MCU*1.89@1030.69,-63.09 1034.97,-58.82 cw(c1105.68,-129.53) 1105.68,-29.53 v1(1211.61,-29.53) 1239.66,-29.53 cw(c1239.66,-129.53) 1310.37,-58.82 MCU*1.8@1370.32,-118.77 1414.94,-163.39 1941.93,-163.39 1972.44,-193.9 1972.44,-310.61 ; v1(1273.62,315.94) 1255.83,333.74 1255.83,468.28 MCU*1.48@1300.73,513.17 ; v1(1362.2,357.28) ccw(c1362.2,370.19) 1371.33,361.06 MCU*1.40@1412.08,401.82 ; v1(1391.78,-25.11) 1391.78,-28.87 MCU*1.12@1426,-63.09 ; v1(1492.13,212.6) ccw(c1492.13,234.64) 1507.71,219.05 MCU*1.30@1551.28,262.62 ; SD*1.4@1889.5,-319.47 1963.58,-319.47 ; 1972.44,-308.07 1972.44,-310.61 ; R5.2@2193.9,-649.61 2199.8,-643.7 2199.8,-546.26 1972.44,-318.9 ; 1963.58,-319.47 1972.44,-310.61 ; 1963.58,-319.47 1971.87,-319.47 1972.44,-318.9 ; 1972.44,-318.9 1972.44,-310.61
  Bottom Layer w10: v1(1273.62,315.94) 1351.38,315.94 ; v1(1362.2,357.28) 1362.2,326.77 ; 1406.5,50.2 1393.21,63.48 ; 1415.85,62.5 1414.86,63.48 1393.21,63.48 ; 1474.41,82.68 1492.13,100.39 ; 1491.14,82.68 1492.13,82.68 1492.13,100.39 ; v1(1492.13,212.6) 1492.13,100.39 ; 1505.91,82.68 1505.91,86.61 1492.13,100.39 ; 1351.38,315.94 1362.2,326.77 ; 1351.38,315.94 1360.24,315.94 1362.2,317.91 ; 1351.38,315.94 1362.2,305.12 ; 1362.2,305.12 1362.2,317.91 ; 1362.2,305.12 1362.2,94.49 1393.21,63.48 ; 1362.2,317.91 1362.2,326.77
  Bottom Layer w15: JTAG1.1@1689.76,683.27 1736.76,730.27 R6.2@2184.01,730.27
  Bottom Layer w20: KC1.2@923.23,390.75 926.17,390.75 1018.7,298.22 v1(1018.7,267.72) v1(1018.7,114.17) C2.1@1018.7,-29.53 ; U1.5@931.26,-42.32 1005.91,-42.32 C2.1@1018.7,-29.53 ; R1.2@968.5,648.62 1528.54,648.62 ; 1406.5,50.2 1406.5,-27.56 C9.2@1404.53,-29.53 ; 1406.5,53.15 1415.85,62.5 1436.02,82.68 1474.41,82.68 1491.14,82.68 ; 1492.13,82.68 1505.91,82.68 1526.55,82.68 ; L2.1@1500.98,564.96 1546.24,564.96 ; 1572.83,82.68 1565.92,82.68 ; L1.1@1597.44,-124.02 1597.44,-120.08 1554.13,-76.77 1451.77,-76.77 C9.2@1404.53,-29.53 ; JTAG1.1@1689.76,683.27 1559.84,683.27 C13.1@1559.06,684.06 ; R4.1@1689.96,178.15 1596.46,84.65 KC6.2@1596.46,82.68 1565.92,82.68 ; C2.1@1018.7,-29.53 v1(1211.61,-29.53) KC5.2@1308.07,-29.53 C9.2@1404.53,-29.53 ; 1526.55,82.68 1546.24,102.36 ; 1526.55,82.68 1546.24,82.68 ; 1528.54,648.62 1546.24,630.93 ; 1528.54,648.62 1543.28,648.62 1546.24,651.57 ; 1528.54,648.62 C13.1@1546.24,666.31 ; 1546.24,82.68 1546.24,102.36 ; 1546.24,82.68 1565.92,82.68 ; 1546.24,102.36 1546.24,564.96 ; 1546.24,102.36 1565.92,82.68 ; 1546.24,564.96 1546.24,630.93 ; 1546.24,630.93 1546.24,651.57 ; 1546.24,651.57 C13.1@1546.24,666.31 ; C13.1@1546.24,666.31 1546.24,671.24 C13.1@1559.06,684.06 ; C13.1@1546.24,666.31 1559.06,679.13 C13.1@1559.06,684.06
K5V: C4.2 F1.1 U1.1 U1.3 | length 529.2
  Bottom Layer w20: U1.3@826.61,32.48 752.95,32.48 750.98,34.45 ; C4.2@831.69,-114.17 826.61,-109.09 U1.1@826.61,-42.32 775.59,-42.32 750.98,-17.72 750.98,34.45 ; F1.1@831.69,206.69 771.65,206.69 750.98,186.02 750.98,34.45
MISO: MCU*1.79 SPI1.4 | length 495.6
  Top Layer w10: SPI1.4@449.13,-52.48 495.71,-5.91 809.49,-5.91 MCU*1.79@891.5,76.1
MOSI: MCU*1.78 SPI1.7 | length 246
  Top Layer w10: SPI1.7@649.13,47.52 835.08,47.52 MCU*1.78@877.58,90.02
NetBTN1_2: BTN1.2 R36.2 | length 257.6
  Top Layer w20: BTN1.2@-1238.58,-516.65 -1238.58,-609.84 -1219.49,-628.94 -1152.56,-628.94 -1108.27,-584.65 v1(-1108.27,-576.77)
NetBTN1_3: BTN1.3 R32.1 | length 312.9
  Top Layer w20: BTN1.3@-1288.58,-516.65 -1288.58,-644.49 -1262.8,-670.28 v1@-1114.17,-670.28
  other v1: -1109.25,-669.29
NetBTN1_5: BTN1.5 R39.2 | length 300.2
  Top Layer w20: v1(-1393.7,-655.51) -1388.58,-650.39 BTN1.5@-1388.58,-516.65
  Bottom Layer w20: R39.2@-1547.24,-669.29 -1407.48,-669.29 v1(-1393.7,-655.51)
NetBTN1_6: BTN1.6 R38.2 | length 237.3
  Top Layer w20: v1(-1453.74,-630.91) -1438.58,-615.75 BTN1.6@-1438.58,-516.65
  Bottom Layer w20: R38.2@-1547.24,-574.8 -1491.14,-630.91 v1(-1453.74,-630.91)
NetBTN2_2: BTN2.2 R37.1 | length 269.5
  Top Layer w20: BTN2.2@-490.55,-516.65 -490.55,-610.83 -471.46,-629.92 -392.72,-629.92 v1(-343.5,-580.71)
NetBTN2_3: BTN2.3 R33.2 | length 344
  Top Layer w20: BTN2.3@-540.55,-516.65 -540.55,-659.25 -527.56,-672.24 v1(-344.49,-672.24)
NetBTN2_5: BTN2.5 R40.2 | length 363.4
  Top Layer w20: v1(-657.48,-698.82) -640.55,-681.89 BTN2.5@-640.55,-516.65
  Bottom Layer w20: R40.2@-814.96,-658.46 -774.61,-698.82 v1(-657.48,-698.82)
NetBTN2_6: BTN2.6 R41.2 | length 268.8
  Top Layer w20: v1(-698.82,-640.75) -690.55,-632.48 BTN2.6@-690.55,-516.65
  Bottom Layer w20: R41.2@-812.01,-572.83 -744.09,-640.75 v1(-698.82,-640.75)
NetBTN3_2: BTN3.2 R26.2 | length 290.9
  Top Layer w20: BTN3.2@690.55,-516.65 690.55,-612.2 713.19,-634.84 808.07,-634.84 830.71,-612.2 v1(830.71,-575.79)
NetBTN3_3: BTN3.3 R22.1 | length 329.2
  Top Layer w20: BTN3.3@640.55,-516.65 640.55,-642.52 672.24,-674.21 v1(830.71,-674.21)
NetBTN3_5: BTN3.5 R29.2 | length 312.9
  Top Layer w20: BTN3.5@540.55,-516.65 540.55,-658.66 v1(541.34,-659.45)
  Bottom Layer w20: R29.2@375.98,-669.29 376.39,-669.7 531.09,-669.7 v1(541.34,-659.45)
NetBTN3_6: BTN3.6 R28.2 | length 261.5
  Top Layer w20: v1(468.5,-631.89) 469.49,-630.91 481.3,-630.91 490.55,-621.65 BTN3.6@490.55,-516.65
  Bottom Layer w20: R28.2@370.57,-569.39 370.57,-580.22 422.24,-631.89 v1(468.5,-631.89)
NetBTN4_2: BTN4.2 R27.1 | length 286.3
  Top Layer w20: BTN4.2@1438.58,-516.65 1438.58,-617.72 1462.6,-641.73 1543.31,-641.73 1563.98,-621.06 v1(1563.98,-579.72)
NetBTN4_3: BTN4.3 R23.2 | length 352.4
  Top Layer w20: BTN4.3@1388.58,-516.65 1388.58,-667.13 1425.2,-703.74 1536.42,-703.74 v1(1563.98,-676.18)
NetBTN4_5: BTN4.5 R30.2 | length 362.3
  Top Layer w20: v1(1259.84,-704.72) 1288.58,-675.98 BTN4.5@1288.58,-516.65
  Bottom Layer w20: R30.2@1117.13,-657.48 1164.37,-704.72 v1(1259.84,-704.72)
NetBTN4_6: BTN4.6 R31.2 | length 271.3
  Top Layer w20: v1(1227.36,-647.64) 1238.58,-636.42 BTN4.6@1238.58,-516.65
  Bottom Layer w20: R31.2@1121.06,-576.77 1191.93,-647.64 v1(1227.36,-647.64)
NetC3_2: C3.2 U1.4 | length 80.8
  Bottom Layer w20: C3.2@926.18,111.22 926.18,37.56 U1.4@931.26,32.48